# EAGLE board Logic_Level_Bidirectional (EAGLE 7.2.0)
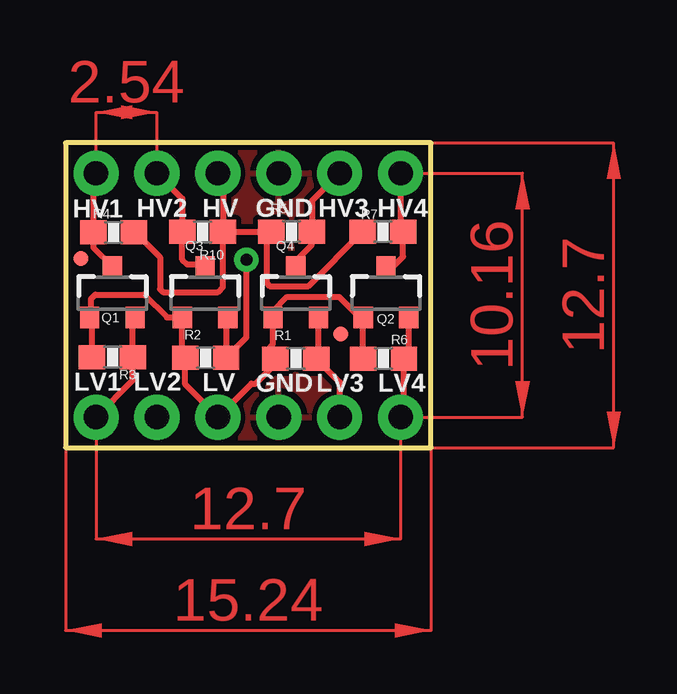
[diagram p0: board, top side]
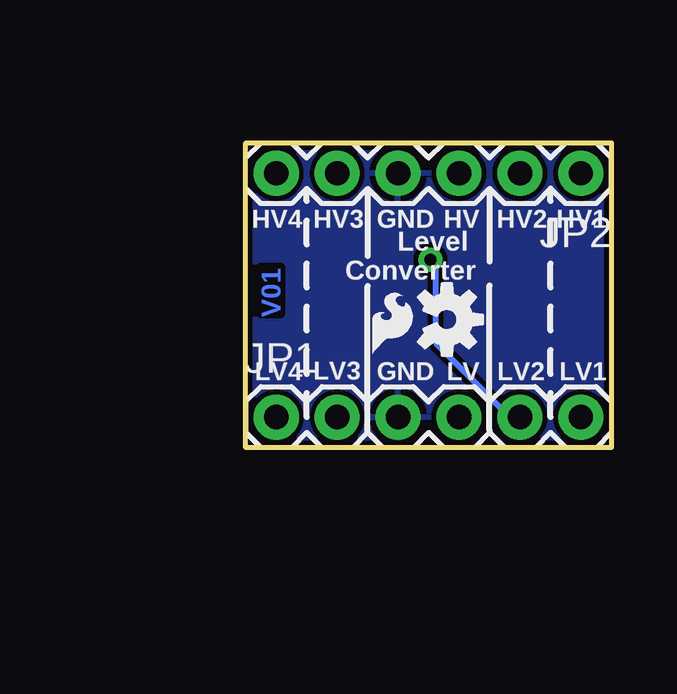
[diagram p1: board, bottom side, seen from below]

Size 15.24 x 12.7 mm. Coordinates in mm from the lower left corner, seen from the top.
Outline: 0,0 15.24,0 15.24,12.7 0,12.7 0,0
Copper layers (1*16): Top 0.035mm / dielectric 1.5mm / Bottom 0.035mm
Design rules "SparkFun *": minimum track width 7mil, minimum drill 15mil, track to track 8mil, track to pad 8mil, pad to pad 8mil, via to via 8mil, smd to smd 8mil, copper to edge 8mil, drill to drill 8mil, minimum pad ring 12mil, minimum via ring 10mil, stop-mask expansion 4mil, vias tented up to drill 20mil, thermal gap 10mil

## Footprints (pad centres in the part's own frame; a part is rotated, then mirrored left to right if it is on the bottom)
1X06 = drill 1.016 pad 1.88: 1 0,0; 2 2.54,0; 3 5.08,0; 4 7.62,0; 5 10.16,0; 6 12.7,0
MICRO-FIDUCIAL = smd 0.635 x 0.635: 1 0,0
SOT23-3 = smd 0.8 x 0.9: 1 -0.95,-1; 2 0.95,-1; 3 0,1.1
0603-RES = smd 1.1 x 1: 1 -0.85,0; 2 0.85,0

## Placement (x,y rotation side)
JP1  [1X06]  13.97,1.27 0 bottom
JP2  [1X06]  1.27,11.43 180 bottom
JP3  FIDUCIALUFIDUCIAL  [MICRO-FIDUCIAL]  0.64,7.87 0 top
JP4  FIDUCIALUFIDUCIAL  [MICRO-FIDUCIAL]  11.48,4.72 0 top
LOGO1  SFE_LOGO_FLAME.1_INCH  [SFE_LOGO_FLAME_.1]  10.29,3.56 0 bottom
LOGO2  OSHW-LOGOS  [OSHW-LOGO-S]  6.86,5.33 270 bottom
Q1  BSS138  [SOT23-3]  1.96,6.43 0 top
Q2  BSS138  [SOT23-3]  13.36,6.43 0 top
Q3  BSS138  [SOT23-3]  5.82,6.43 0 top
Q4  BSS138  [SOT23-3]  9.6,6.43 0 top
R1  10K  [0603-RES]  9.6,3.71 0 top
R2  10K  [0603-RES]  5.84,3.73 0 top
R3  10K  [0603-RES]  1.96,3.76 0 top
R4  10K  [0603-RES]  2.01,8.97 180 top
R5  10K  [0603-RES]  9.42,8.99 0 top
R6  10K  [0603-RES]  13.26,3.71 0 top
R7  10K  [0603-RES]  13.23,8.99 0 top
R10  10K  [0603-RES]  5.71,8.99 180 top

## Library data of the parts
JP1 JP2 Q1-Q4 R1-R7 R10 = SparkFun
JP3 JP4 LOGO1 LOGO2 = SparkFun-Aesthetics

## Nets
GND: JP1.3 JP2.4
HV: JP2.3 R4.1 R5.1 R7.1 R10.1
HV1: JP2.1 Q1.3 R4.2
HV2: JP2.2 Q3.3 R10.2
HV3: JP2.5 Q4.3 R5.2
HV4: JP2.6 Q2.3 R7.2
LV: JP1.4 Q1.1 Q2.1 Q3.1 Q4.1 R1.1 R2.1 R3.1 R6.1
LV1: JP1.6 Q1.2 R3.2
LV2: JP1.5 Q3.2 R2.2
LV3: JP1.2 Q4.2 R1.2
LV4: JP1.1 Q2.2 R6.2

## Tracks (layer width: path | path; a pad name or v marks a point on that pad's centre or on a via)
GND
  pour Top: 0,12.7 15.24,12.7 15.24,0 0,0
  pour Bottom: 0,12.7 15.24,12.7 15.24,0 0,0
HV
  Top 0.254: R10.1 R5.1 8.38,8.8 8.38,6.86 8.51,6.73 10.12,6.73 R7.1 | R4.1 2.91,8.97 3.94,7.94 3.94,6.6 4.06,6.48 6.35,6.48 6.57,6.69 R10.1 | JP2.3 6.57,11.21 R10.1
HV1
  Top 0.254: JP2.1 1.16,11.32 R4.2 1.16,8.32 Q1.3
HV2
  Top 0.254: JP2.2 4.87,10.38 R10.2 4.87,7.83 5.08,7.62 5.72,7.62 Q3.3
HV3
  Top 0.254: JP2.5 10.27,10.27 R5.2 10.27,8.45 9.6,7.78 Q4.3
HV4
  Top 0.254: Q2.3 13.65,7.53 14.07,7.95 R7.2 13.97,9.11 JP2.6
LV
  Top 0.254: R3.1 1.11,5.33 1.07,5.37 | 1.07,5.37 Q1.1 | 1.07,5.37 1.07,6.2 1.25,6.38 3.28,6.38 4.23,5.43 Q3.1 4.87,3.86 R2.1 4.99,2.63 JP1.4 7.75,2.67 7.92,2.67 8.75,3.49 R1.1 8.4,4.06 8.65,4.32 Q4.1 8.65,5.68 9.24,6.27 11.4,6.27 12.25,5.43 Q2.1 | 12.18,5.43 Q2.1 | R6.1 12.28,3.83 12.41,3.96 Q2.1
LV1
  Top 0.254: Q1.2 2.81,5.33 R3.2 2.81,2.81 JP1.6
LV2  (via drill 0.51)
  Top 0.254: v7.54,7.82 7.54,4.59 R2.2 6.69,5.35 Q3.2
  Bottom 0.254: JP1.5 4.23,1.27 7.31,4.35 7.31,7.59 v7.54,7.82
LV3
  Top 0.254: JP1.2 11.43,2.73 R1.2 10.3,3.86 10.55,4.12 Q4.2
LV4
  Top 0.254: JP1.1 14.11,1.41 R6.2 14.31,3.91 Q2.2
(copper drawn outside any net)
  shapes: Top area x5

## Text on the board
Bottom: V01
tPlace: HV1 | HV2 | HV | GND | HV3 | HV4 | LV1 | LV2 | LV | GND | LV3 | LV4
bPlace: HV1 | HV2 | Level / Converter | HV | GND | HV3 | HV4 | LV1 | LV2 | LV | GND | LV3 | LV4
tValues: Nathan Seidle | Rev V13 by Patrick Alberts